# Altium PCB Digital_Clock_PCB_3.0.PcbDoc
Units mm, origin at the board's own origin, x right, y up, seen from the top; angles counter-clockwise.
Board outline 80.51 x 45.51 mm, 2 copper layers (Top Layer, Bottom Layer); 42 components, 38 nets, 161 pads, 318 vias.
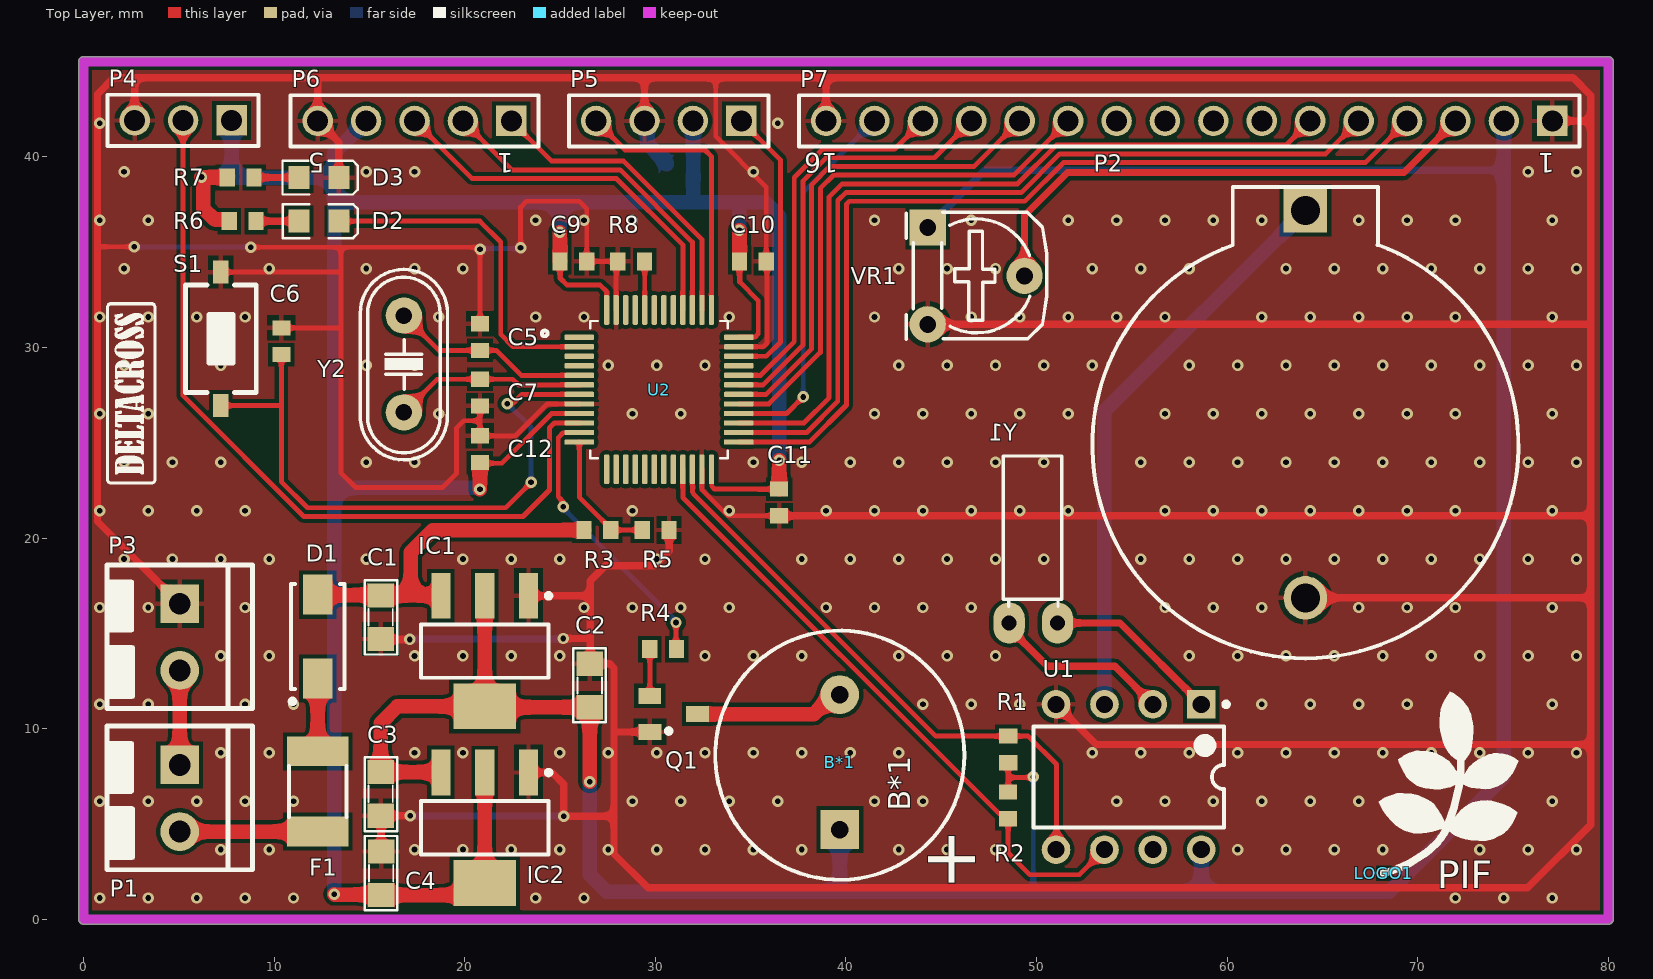
[diagram p0: Top Layer view]
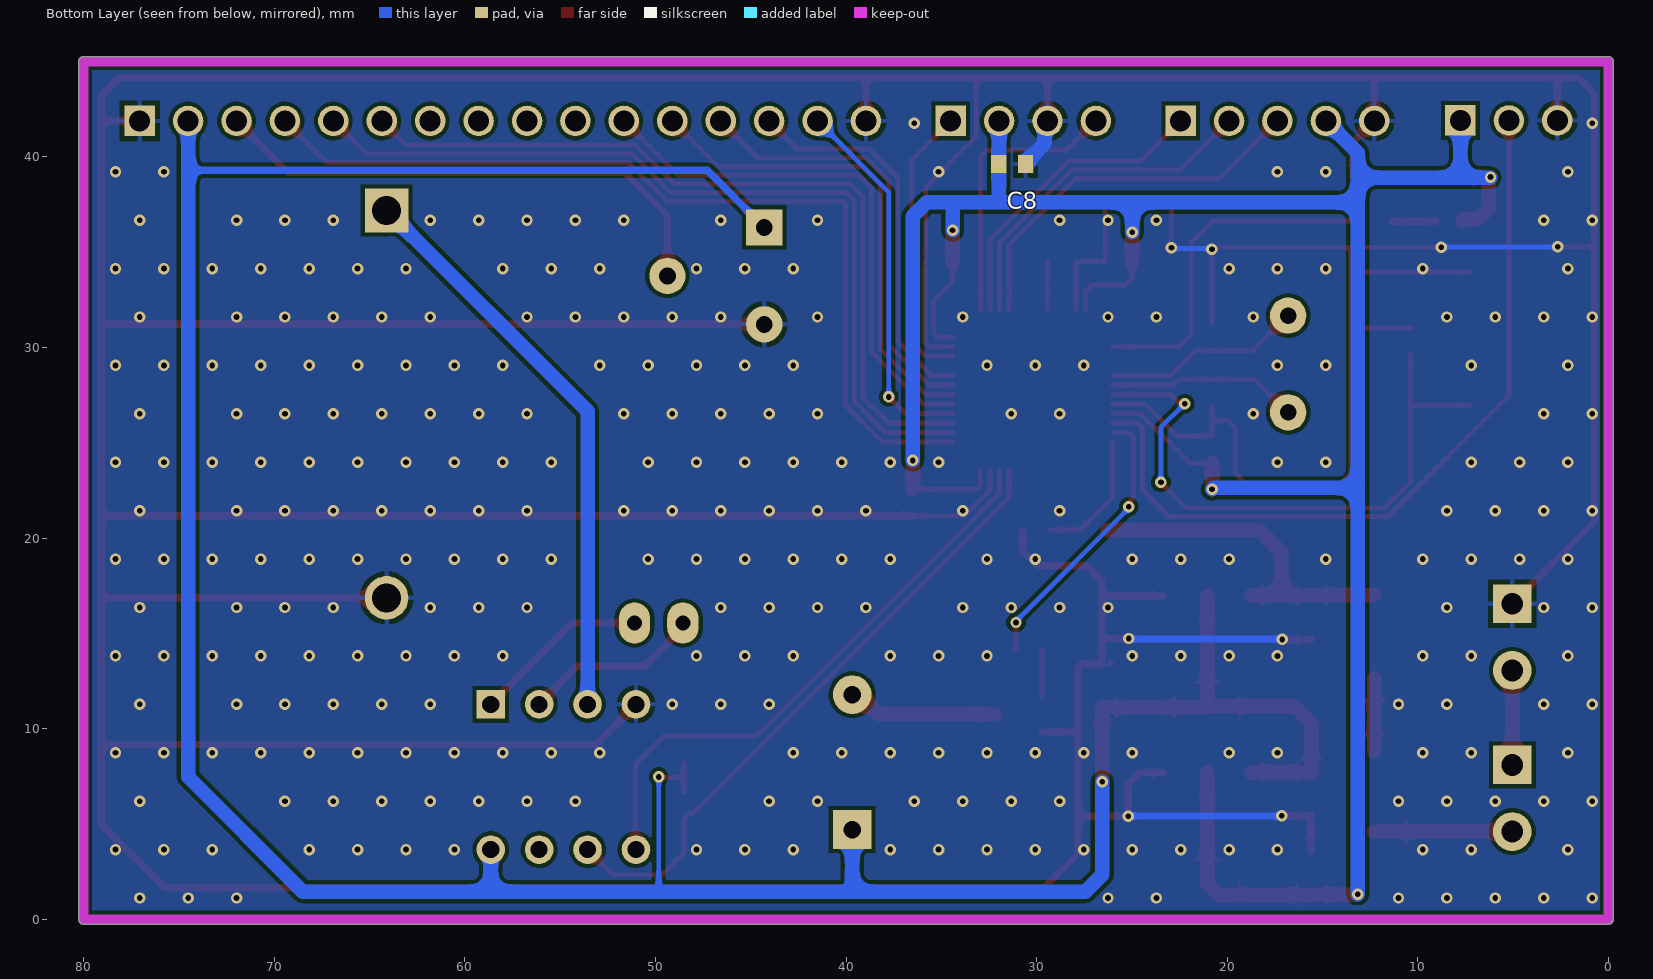
[diagram p1: Bottom Layer view, seen from below]
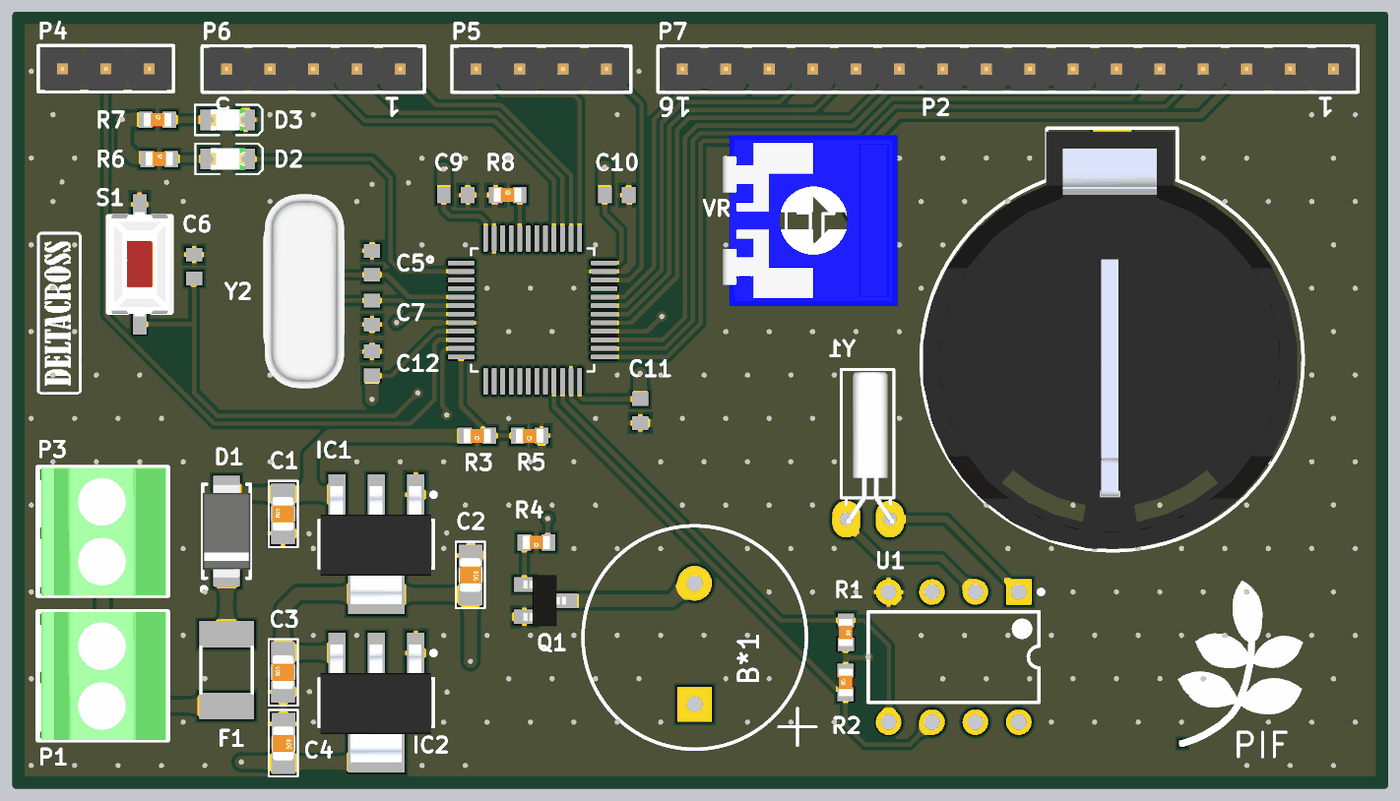
[diagram p2: 3D render of the assembled board from above, using the file's embedded part models]

## Layer stack, top to bottom
Top Solder: solder mask 0.0102, Solder Resist, Dk 3.5
Top Layer: signal copper 0.0356
Dielectric 1: dielectric 0.32, FR-4, Dk 4.8
Bottom Layer: signal copper 0.0356
Bottom Solder: solder mask 0.0102, Solder Resist, Dk 3.5

## Board outline
0,-0.254 cw(c0,0) -0.254,0 -0.254,45 cw(c0,45) 0,45.254 80,45.254 cw(c80,45) 80.254,45 80.254,0 cw(c80,0) 80,-0.254

## Design rules (kind name [scope] priority, off if disabled: settings)
Clearance [All] p1: gap=0.203 ignorepadtopadclearanceinfootprint=TRUE
PolygonConnect [All] p1: thpad.connectstyle=Relief thpad.reliefconductorwidth=0.254 thpad.reliefentries=4 thpad.polygonreliefangle="90 Angle" thpad.airgapwidth=0.254 smdpad.connectstyle=Relief smdpad.reliefconductorwidth=0.254 smdpad.reliefentries=4 smdpad.polygonreliefangle="90 Angle" smdpad.airgapwidth=0.254 via.connectstyle=Direct via.reliefconductorwidth=0.254 via.reliefentries=4 via.polygonreliefangle="90 Angle" via.airgapwidth=0.254
RoutingVias [All] p1: holewidth=0.711 width=1.27 viastyle="Through Hole" minholewidth=0.3 minwidth=0.5 maxholewidth=0.711 maxwidth=1.27
SolderMaskExpansion [All] p1: expansion=0.102 istentingtop=FALSE
Width [All] p1: maxlimit=0.762 minlimit=0.254 preferedwidth=0.381
30 further rules are at their usual default settings.

## Components (designator, comment, footprint, x,y, rotation, side; value= is the part's Value field where it differs from the comment)
B*1 "Buzzer" BUZZER 39.675,6.706 r90 top
C1 "Cap Non-Pol SMD" CAP-SM-0805 15.586,14.707 r90 top value=10uF
C2 "Cap Non-Pol SMD" CAP-SM-0805 26.559,13.411 r270 top value=10uF
C3 "Cap Non-Pol SMD" CAP-SM-0805 15.586,5.436 r90 top value=10uF
C4 "Cap Non-Pol SMD" CAP-SM-0805 15.612,3.556 r270 top value=10uF
C5 "Cap Non-Pol SMD" CAP-SM-0603 20.801,30.547 r270 top value=22pF
C6 "Cap Non-Pol SMD" CAP-SM-0603 10.379,30.328 r270 top value=0.1uF
C7 "Cap Non-Pol SMD" CAP-SM-0603 20.801,27.636 r270 top value=22pF
C8 "Cap Non-Pol SMD" CAP-SM-0603 31.283,39.624 r0 bottom value=0.1uF
C9 "Cap Non-Pol SMD" CAP-SM-0603 25.695,34.519 r180 top value=100nF
C10 "Cap Non-Pol SMD" CAP-SM-0603 35.119,34.519 r180 top value=100nF
C11 "Cap Non-Pol SMD" CAP-SM-0603 36.49,21.869 r90 top value=100nF
C12 "Cap Non-Pol SMD" CAP-SM-0603 20.793,24.663 r270 top value=100nF
D1 "D Schottky" SS34 12.284,14.834 r90 top
D2 "LED SMD" LED_0805_Blue 12.36,36.627 r0 top
D3 "LED SMD" LED_0805_Blue 12.344,38.913 r0 top
F1 "Fuse" "FUSE SMD" 12.284,6.706 r270 top
IC1 "LM1117" SOT223-4N 21.047,14.072 r270 top value=LM317
IC2 "LM1117" SOT223-4N 21.047,4.801 r270 top value=LM317
LOGO1 "LOGO PIF" "PIF LOGO BIG SSTOP" 67.936,2.057 r0 top
P1 "Domino 2" "DOMINO SMALL 2" 6.315,8.103 r270 top
P2 "VBAT" "VBAT CR2030" 64.1,27.026 r90 top
P3 "Domino 2" "DOMINO SMALL 2" 6.315,16.556 r270 top
P4 "61300311121" 61300311121 5.223,41.91 r180 top
P5 "61300411121" 61300411121 30.699,41.885 r180 top
P6 "61300511121" 61300511121 17.364,41.885 r180 top
P7 "61301611121" 61301611121 58.004,41.885 r180 top
Q1 "C1815" SOT23B 30.953,10.77 r270 top
R1 "RESISTOR SMD" RES-SM-0603 48.512,9.597 r270 top value=10K
R2 "RESISTOR SMD" RES-SM-0603 48.505,5.294 r90 top value=10K
R3 "RESISTOR SMD" RES-SM-0603 27.64,20.422 r180 top value=20K
R4 "RESISTOR SMD" RES-SM-0603 31.094,14.173 r180 top value=22K
R5 "RESISTOR SMD" RES-SM-0603 30.699,20.422 r180 top value=10K
R6 "RESISTOR SMD" RES-SM-0603 7.661,36.627 r0 top value=1K
R7 "RESISTOR SMD" RES-SM-0603 7.559,38.919 r0 top value=1K
R8 "RESISTOR SMD" RES-SM-0603 28.043,34.519 r0 top value=100K
S1 "Tact SW - 2Pin" SW-SMD 7.204,30.455 r90 top
U1 "DS1307+" MAXM-P8-1 54.829,7.468 r270 top
U2 "STM32F103C8T6" QFP50P900X900X160-48N 30.191,27.788 r0 top
VR1 "10K" "Varistor 1" 44.288,36.297 r270 top value="VR 10K"
Y1 "32.768kHz" "XTAL 32768 3x8" 48.555,15.545 r90 top
Y2 "XTAL" XT2 16.805,29.134 r90 top

## Footprints (in the part's own frame and the unit in brackets; to place one, negate y for a bottom-side part, rotate by r counter-clockwise, add the part's x,y. Pads: shape width x height; smd on the part's side, far side on the other; paste and mask are expansions set on the pad)
61300311121 [mm] "Pin Header, pitch 2.54 mm, THT, Vertical, single row, 3p"
  rect 1.6x1.6 hole 1.1: 1(-2.54,0)
  round 1.6 hole 1.1: 2(0,0) 3(2.54,0)
  silkscreen extent -3.96,-1.35 3.96,1.35, body extent -3.81,-1.27 3.81,1.27, height 8.57
61300411121 [mm] "Pin Header, pitch 2.54 mm, THT, Vertical, single row, 4p"
  rect 1.6x1.6 hole 1.1: 1(-3.81,0)
  round 1.6 hole 1.1: 2(-1.27,0) 3(1.27,0) 4(3.81,0)
  silkscreen extent -5.23,-1.35 5.23,1.35, body extent -5.08,-1.27 5.08,1.27, height 8.57
61300511121 [mm] "Pin Header, pitch 2.54 mm, THT, Vertical, single row, 5p"
  rect 1.6x1.6 hole 1.1: 1(-5.08,0)
  round 1.6 hole 1.1: 2(-2.54,0) 3(0,0) 4(2.54,0) 5(5.08,0)
  silkscreen extent -6.5,-1.35 6.5,1.35, body extent -6.35,-1.27 6.35,1.27, height 8.57
61301611121 [mm] "Pin Header, pitch 2.54 mm, THT, Vertical, single row, 16p"
  rect 1.6x1.6 hole 1.1: 1(-19.05,0)
  round 1.6 hole 1.1: 2(-16.51,0) 3(-13.97,0) 4(-11.43,0) 5(-8.89,0) 6(-6.35,0) 7(-3.81,0) 8(-1.27,0) 9(1.27,0) 10(3.81,0) 11(6.35,0) 12(8.89,0) 13(11.43,0) 14(13.97,0) 15(16.51,0) 16(19.05,0)
  silkscreen extent -20.47,-1.35 20.47,1.35, body extent -20.32,-1.27 20.32,1.27, height 8.57
BUZZER [mil]
  rect 80x80 hole 36: 1(-78.73,0)
  round 80 hole 36: 2(200,0)
  silkscreen extent -182,-257 332,257
CAP-SM-0603 [mm] "SMD Ceramic Capacitor Size 0603"
  rect 0.8x0.95 smd: 1(-0.7,0) 2(0.7,0)
  body extent -0.85,-0.45 0.85,0.45, height 0.6
CAP-SM-0805 [mil]
  rect 50x55 smd: 1(0,0) 2(90,0)
  silkscreen extent -32,-34 121,33, body extent 6,-25 84,25, height 31
"DOMINO SMALL 2" [mil] "3.5 mm"
  rect 80x80 hole 45: 1(0,-50)
  round 80 hole 45: 2(137.8,-50)
  silkscreen extent -80,-203 217,100, body extent -79,-192 217,95, height 335
"FUSE SMD" [mm] "SMD FUSE"
  rect 1.55x3.21 smd: 1(-2.1,0) 2(2.1,0)
  silkscreen extent -1.35,-1.5 1.35,1.51, body extent -2.37,-1.71 2.36,1.71, height 0.75
LED_0805_Blue [mm] "Chip LED, 2-Leads, Body 2.0x1.3mm, IPC Medium Density"
  rect 1.1x1.2 smd: 1(-1.05,0) 2(1.05,0)
  silkscreen extent -1.91,-0.89 2.03,0.89, body extent -1,-0.63 1,0.62, height 0.68
MAXM-P8-1 [mm] "DIP, 8-Leads, Body 9.375x6.985mm, Pitch 2.54mm"
  rect 1.5x1.5 hole 0.9: 1(-3.81,3.81)
  round 1.5 hole 0.9: 2(-3.81,1.27) 3(-3.81,-1.27) 4(-3.81,-3.81) 5(3.81,-3.81) 6(3.81,-1.27) 7(3.81,1.27) 8(3.81,3.81)
  silkscreen extent -3.93,-5 2.65,5.24, body extent -3.95,-4.95 3.95,4.95, height 4.58
"PIF LOGO BIG SSTOP" [mil]
  rect 15x15 smd: 1(11,14)
  silkscreen extent 0,14 289,389
QFP50P900X900X160-48N [mm]
  rrect50% 1.56x0.28 smd: 1(-4.18,2.75) 2(-4.18,2.25) 3(-4.18,1.75) 4(-4.18,1.25) 5(-4.18,0.75) 6(-4.18,0.25) 7(-4.18,-0.25) 8(-4.18,-0.75) 9(-4.18,-1.25) 10(-4.18,-1.75) 11(-4.18,-2.25) 12(-4.18,-2.75) 25(4.18,-2.75) 26(4.18,-2.25) 27(4.18,-1.75) 28(4.18,-1.25) 29(4.18,-0.75) 30(4.18,-0.25) 31(4.18,0.25) 32(4.18,0.75) 33(4.18,1.25) 34(4.18,1.75) 35(4.18,2.25) 36(4.18,2.75)
  rrect50% 0.28x1.56 smd: 13(-2.75,-4.18) 14(-2.25,-4.18) 15(-1.75,-4.18) 16(-1.25,-4.18) 17(-0.75,-4.18) 18(-0.25,-4.18) 19(0.25,-4.18) 20(0.75,-4.18) 21(1.25,-4.18) 22(1.75,-4.18) 23(2.25,-4.18) 24(2.75,-4.18) 37(2.75,4.18) 38(2.25,4.18) 39(1.75,4.18) 40(1.25,4.18) 41(0.75,4.18) 42(0.25,4.18) 43(-0.25,4.18) 44(-0.75,4.18) 45(-1.25,4.18) 46(-1.75,4.18) 47(-2.25,4.18) 48(-2.75,4.18)
  silkscreen extent -6.15,-3.6 3.6,3.6
RES-SM-0603 [mm]
  rect 0.8x0.95 smd: 1(-0.014,0) 2(1.386,0)
  body extent -0.11,-0.4 1.49,0.4, height 0.3
SOT23B [mm] "SOT 23B"
  rect 0.85x1.2 smd: 1(0.94,-1.245) 2(0,1.25) 3(-0.95,-1.25)
  silkscreen extent 0.77,-0.38 1.02,-0.13, body extent -1.5,-1.3 1.5,1.2, height 1.06
SOT223-4N [mm] "SOT223, 4-Leads, Body 6.5x3.5mm, Pitch 2.3mm, Lead Span 7mm, IPC Medium Density"
  rect 2.4x1 smd: 1(-2.9,2.3) 2(-2.9,0) 3(-2.9,-2.3)
  rect 2.4x3.3 smd: 4(2.9,0)
  silkscreen extent -3.02,-3.35 1.4,3.48, body extent -3.39,-3.27 3.5,3.23, height 1.72
SS34 [mm] "DO-214-AC/SMA Molded Diode, Body 5.3x2.6mm, IPC Medium Density"
  rect 2.1x1.55 smd: 1(-2.2,0) 2(2.2,0)
  silkscreen extent -3.52,-1.4 2.75,1.45, body extent -2.75,-1.4 2.75,1.4, height 2.3
SW-SMD [mm] "Switch SMD type"
  rect 1.2x0.8 smd: 1(-3.5,0) 2(3.5,0)
  silkscreen extent -2.82,-1.85 2.82,1.85, body extent -3.05,-1.85 3.05,1.85, height 2.5
"Varistor 1" [mil] "Resistor Variable"
  rect 75x75 hole 35: 1(0,0)
  round 75 hole 35: 2(100,200) 3(200,0)
  silkscreen extent -31,-44 231,246, body extent -68,-117 326,285, height 165
"VBAT CR2030" [mil]
  rect 90x90 hole 60: 1(400,0)
  round 90 hole 60: 2(-400,0)
  silkscreen extent -525,-440 449,440, body extent -523,-428 442,438, height 335
XT2 [mil] "Footpin for Crystal 2 pin"
  round 75 hole 34: 1(-100,0) 2(100,0)
  silkscreen extent -198,-90 195,90, body extent -233,-93 213,90, height 138
"XTAL 32768 3x8" [mil] "Crystal for 32,768kHz, 2pin"
  oval 85x65 hole 31: 1(0,0) 2(0,-100)
  silkscreen extent 34,-109 345,12, body extent -11,-111 339,1, height 98

## Part data
C1 C2 C3 C4 C5 C6 C7 C8 C9 C10 C11 C12: "Capacitor"
D1: "Schottky Diode", Code_JEDEC=DO-214-AA, LatestRevisionDate=17-Jul-2002, LatestRevisionNote="Re-released for DXP Platform.", PackageDescription="DO-214-AA/SMB; 2 C-Bend Leads; Body 5.3 x 3.6 mm, inc. leads (LxW)", PackageReference=SMB, Published=8-Jun-2000, Publisher="Altium Limited"
D2 D3: "LED"
IC1 IC2: "Available in 1.8V, 2.5V, 2.85V, 3.3V, 5V, and  Adjustable Versions"
P1 P3: "Domino, 2-Pin", LatestRevisionDate=17-Jul-2002, LatestRevisionNote="Re-released for DXP Platform.", Publisher="Altium Limited"
P2: library part "VBAT CR2032", "CR2032", Manufacturer="DANTONA INDUSTRIES", Manufacturer Part Number="CR2032 SANYO", ComponentLink1Description=http://www.farnell.com/datasheets/1797668.pdf, ComponentLink1URL=http://www.farnell.com/datasheets/1797668.pdf, ComponentLink2Description=/datasheets/DANTONA/CRSANYO.pdf, ComponentLink2URL=/datasheets/DANTONA/CRSANYO.pdf, Pricing 1="1=0.768, 5=0.655, 10=0.615, 25=0.565, 50=0.51, 100=0.46, 250=0.41 (USD)", RoHS=NA, Stock 1=1694, Supplier 1=Newark
P4: "WR-PHD Pin Header, THT, pitch 2.54mm, Single Row, Vertical, 3p", Contact Resistance=20mOhm, Manufacturer="Wurth Elektronik", Operating Temperature="-40 to +105degC", Rated Current=3A, Withstanding Voltage=500VAC, Working Voltage=250VAC, ComponentLink1Description=Manufacturer, ComponentLink1URL=http://www.we-online.de, ComponentLink2Description=Datasheet, ComponentLink2URL=https://www.we-online.com/catalog/datasheet/61300311121.pdf, Gender="Pin Header", Manufacturer Part Number=61300311121, Mounting Technology=THT, Orientation=Vertical, Packaging=Bag, Pin Number=3, Pitch=2.54mm, Published Date="May 2020", Row Number=Single
P5: "WR-PHD Pin Header, THT, pitch 2.54mm, Single Row, Vertical, 4p", Contact Resistance=20mOhm, Manufacturer="Wurth Elektronik", Operating Temperature="-40 to +105degC", Rated Current=3A, Withstanding Voltage=500VAC, Working Voltage=250VAC, ComponentLink1Description=Manufacturer, ComponentLink1URL=http://www.we-online.de, ComponentLink2Description=Datasheet, ComponentLink2URL=https://www.we-online.com/catalog/datasheet/61300411121.pdf, Gender="Pin Header", Manufacturer Part Number=61300411121, Mounting Technology=THT, Orientation=Vertical, Packaging=Bag, Pin Number=4, Pitch=2.54mm, Published Date="May 2020", Row Number=Single
P6: "WR-PHD Pin Header, THT, pitch 2.54mm, Single Row, Vertical, 5p", Contact Resistance=20mOhm, Manufacturer="Wurth Elektronik", Operating Temperature="-40 to +105degC", Rated Current=3A, Withstanding Voltage=500VAC, Working Voltage=250VAC, ComponentLink1Description=Manufacturer, ComponentLink1URL=http://www.we-online.de, ComponentLink2Description=Datasheet, ComponentLink2URL=https://www.we-online.com/catalog/datasheet/61300511121.pdf, Gender="Pin Header", Manufacturer Part Number=61300511121, Mounting Technology=THT, Orientation=Vertical, Packaging=Bag, Pin Number=5, Pitch=2.54mm, Published Date="May 2020", Row Number=Single
P7: "WR-PHD Pin Header, THT, pitch 2.54mm, Single Row, Vertical, 16p", Contact Resistance=20mOhm, Manufacturer="Wurth Elektronik", Operating Temperature="-40 to +105degC", Rated Current=3A, Withstanding Voltage=500VAC, Working Voltage=250VAC, ComponentLink1Description=Manufacturer, ComponentLink1URL=http://www.we-online.de, ComponentLink2Description=Datasheet, ComponentLink2URL=https://www.we-online.com/catalog/datasheet/61301611121.pdf, Gender="Pin Header", Manufacturer Part Number=61301611121, Mounting Technology=THT, Orientation=Vertical, Packaging=Bag, Pin Number=16, Pitch=2.54mm, Published Date="May 2020", Row Number=Single
Q1: "NPN Bipolar Transistor"
R1 R2 R3 R4 R5 R6 R7 R8: "Resistor"
S1: "Switch button 2 pin"
U1: library part CMP-016-00004-3, "I2C Real-Time Clock, 5 V, 0 to 70 degC, 8-Pin DIP, RoHS, Tube", Case/Package=DIP, Manufacturer=Maxim, Max Operating Temperature=70°C, Max Supply Voltage=5.5V, Min Operating Temperature=0°C, Min Supply Voltage=4.5V, Nominal Supply Voltage=5V, Package Description="8-Pin Plastic Dual-In-Line, Narrow (0.3in) (P8-1), Body 9.375 x 6.985 mm, Pitch 2.54 mm", Package Quantity=50, Package Reference=P8-1, Package Version="Rev. E, 04/2011", Datasheet URL=https://datasheet.ciiva.com/20167/82-0567-20167410.pdf, Datasheet Version="Rev. 100208, 10/2008", Interface=Serial, Manufacturer URL=http://www.maximintegrated.com/, Mounting Technology=TH, Package URL=http://pdfserv.maximintegrated.com/package_dwgs/21-0043.PDF, Packaging=Rail/Tube, Pins=8, RoHS Compliant=True
U2: "Mainstream Performance line, ARM Cortex-M3 MCU with 64 Kbytes Flash, 72 MHz CPU, motor control, USB and CAN", Package=None, Availability=Unavailable, MP=STM32F103C8T6, Price=None
VR1: library part "Var Resistor", "Var Resistor"
Y1: library part XTAL, "Crystal For all Crystal 2pin"
Y2: "Crystal Oscillator", LatestRevisionDate=17-Jul-2002, LatestRevisionNote="Re-released for DXP Platform.", PackageDescription="Crystal, Thru-Hole; 2 Leads; Body 3.1 x 8.2 mm (Dia.xH)", PackageReference=R38, Published=8-Jun-2000, Publisher="Altium Limited"

## Via types
v1: diameter 0.6, hole 0.3, Top Layer to Bottom Layer, tented both sides, 318 vias

## Nets (pads, with @x,y where several pads share a name; then routed paths per layer and width w, separated by ;. In a path a pad name is that pad's centre, name@x,y a point inside that pad or via, vN(x,y) a via of type N, cw(c..) or ccw(c..) an arc to the next point about the centre after c; other vN are vias at no path point)
3V3: C4.2 C8.2 C9.2 C10.2 C11.2 C12.2 IC2.2 IC2.4 P4.1 P5.2 P6.4 R6.1 R7.1 U2.9 U2.24 U2.36 U2.48 | length 148.2
  Top Layer w0.254: C12.2 20.83,23.927 21.946,23.927 24.557,26.538 U2.9 ; C9.2 24.995,33.644 25.365,33.274 27.104,33.274 27.441,32.937 U2.48 ; U2.24 32.954,23.595 32.954,22.718 33.103,22.569 C11.2 ; U2.36 34.384,30.551 35.24,30.551 35.398,30.709 35.398,32.461 34.419,33.441 C10.2
  Top Layer w0.762: v1(6.188,38.938) 6.198,38.929 v1@6.204,38.929 ; R7.1 7.535,38.929 v1@6.204,38.929 ; R7.1@7.578,38.964 R7.1@7.578,38.976 ; R6.1 7.647,36.702 7.628,36.721 6.856,36.721 6.285,37.292 6.285,38.816 6.188,38.913 v1@6.204,38.929 ; v1(13.148,1.321) 13.173,1.295 15.586,1.295 C4.2 20.417,1.27 IC2.4 IC2.2 ; v1(20.793,22.555) C12.2 ; v1(24.984,36.043) 24.99,36.037 24.99,34.524 C9.2 ; v1(34.408,36.144) 34.413,36.139 34.413,34.524 C10.2 ; C11.2 36.493,22.572 36.493,24.07 v1(36.495,24.072)
  Bottom Layer w0.762: v1@6.214,38.913 7.763,38.913 ; P4.1 7.763,38.913 ; v1(13.148,1.321) 13.148,22.631 ; P6.4 13.148,40.208 13.148,38.913 ; v1(20.793,22.555) 20.717,22.631 13.148,22.631 ; v1(24.984,36.043) 24.984,37.617 ; P5.2 31.976,41.878 31.976,39.631 C8.2 31.983,37.632 31.969,37.617 ; v1(34.408,36.144) 34.408,37.592 34.433,37.617 ; v1(36.495,24.072) 36.495,36.877 35.754,37.617 34.433,37.617 ; 7.763,38.913 13.148,38.913 ; 13.148,22.631 13.148,37.617 ; 13.148,37.617 13.148,38.913 ; 13.148,37.617 24.984,37.617 ; 24.984,37.617 31.969,37.617 ; 31.969,37.617 34.433,37.617
5V: B*1.1 C2.2 C3.2 IC1.2 IC1.4 IC2.3 P7.2 R1.2 R2.2 U1.8 VR1.1 | length 162.8
  Top Layer w0.254: R2.2 48.505,7.442 ; R1.2 48.505,8.203 48.505,7.442 ; v1(49.825,7.468) 49.8,7.442 48.505,7.442
  Top Layer w0.762: IC2.3 18.726,7.722 C3.2 15.586,10.287 16.471,11.172 IC1.4 ; IC1.2 IC1.4 ; v1(26.559,7.214) C2.2 21.094,11.125 IC1.4
  Bottom Layer w0.254: 49.825,1.448 v1(49.825,7.468)
  Bottom Layer w0.381: VR1.1 47.285,39.294 74.514,39.294
  Bottom Layer w0.762: v1(26.559,7.214) 26.559,2.337 27.448,1.448 39.675,1.448 ; B*1.1 39.675,1.448 ; 40.097,1.473 40.123,1.448 ; U1.8 58.639,1.448 ; P7.2 74.514,39.294 74.514,7.468 68.494,1.448 58.639,1.448 ; 39.675,1.448 40.123,1.448 ; 40.123,1.448 49.825,1.448 58.639,1.448
ADC_PIN: R3.1 R5.2 U2.12 | length 7
  Top Layer w0.254: U2.12 26.011,22.14 27.654,20.497 R3.1 R5.2
BL: P7.15 U2.28 | length 19.8
  Top Layer w0.254: U2.28 36.891,26.538 v1(37.76,27.407)
  Bottom Layer w0.254: v1(37.76,27.407) 37.76,38.151 P7.15
BOOT0: R8.2 U2.44 | length 2.6
  Top Layer w0.254: R8.2 29.441,34.507 U2.44
BUZZER: R4.1 U2.11 | length 14.9
  Top Layer w0.254: v1(25.162,21.641) 25.162,21.916 24.901,22.177 24.901,25.273 25.152,25.525 25.998,25.525 U2.11 ; v1(31.08,15.57) 31.08,14.202 R4.1
  Bottom Layer w0.254: v1(25.162,21.641) 25.162,21.565 31.08,15.646 v1(31.08,15.57)
D4: P7.11 U2.29 | length 28.5
  Top Layer w0.254: U2.29 35.953,27.038 38.654,29.739 38.654,38.351 39.343,39.04 48.809,39.04 P7.11
D5: P7.12 U2.30 | length 25.7
  Top Layer w0.254: U2.30 35.806,27.538 38.197,29.928 38.197,38.54 39.154,39.497 46.727,39.497 P7.12
D6: P7.13 U2.31 | length 23
  Top Layer w0.254: U2.31 35.66,28.038 37.74,30.117 37.74,38.729 38.964,39.954 44.644,39.954 P7.13
D7: P7.14 U2.32 | length 20.2
  Top Layer w0.254: U2.32 35.513,28.538 37.282,30.307 37.282,38.919 38.775,40.411 42.561,40.411 P7.14@44.018,41.868
DHT_PIN: P4.2 U2.10 | length 41.8
  Top Layer w0.254: P4.2 5.223,27.469 11.559,21.133 23.054,21.133 24.444,22.523 24.444,25.778 24.704,26.038 U2.10
EN: P7.6 U2.27 | length 42.7
  Top Layer w0.254: U2.27 37.788,26.038 39.111,27.36 39.111,37.898 39.796,38.583 48.999,38.583 51.031,40.615 63.084,40.615 P7.6
GND: C1.1 C2.1 C3.1 C4.1 C5.1 C6.1 C7.2 C8.1 C9.1 C10.1 C11.1 C12.1 D3.2 IC1.1 IC2.1 P2.2 P3.1 P4.3 P5.3 P6.5 P7.1 P7.16 Q1.1 R5.1 R8.1 S1.2 U1.4 U2.8 U2.23 U2.35 U2.47 VR1.3 | length 493.6
  Top Layer w0.254: 0.727,35.281 v1(2.658,35.281) ; S1.2 13.473,33.955 13.503,33.985 ; v1@8.785,35.261 13.503,35.261 ; C6.1 13.441,31.028 13.503,31.09 ; C7.2 20.801,26.153 ; C5.1 v1(20.801,35.146) 20.686,35.261 13.503,35.261 ; v1(22.927,35.23) 22.927,37.363 23.232,37.668 26,37.668 26.395,37.273 C9.1 27.853,34.519 27.941,34.431 U2.47 ; U2.8 24.336,27.038 22.662,25.363 C12.1 20.801,25.371 20.801,26.153 ; U2.23 32.441,22.524 33.796,21.169 C11.1 ; 33.163,44.145 33.163,41.072 35.819,38.416 C10.1 35.855,34.482 35.855,30.223 35.67,30.038 U2.35 ; 13.503,31.09 13.503,33.985 ; 13.503,31.09 13.503,23.419 14.265,22.657 18.837,22.657 19.574,23.393 19.574,25.781 19.946,26.153 20.801,26.153 ; 13.503,33.985 13.503,35.261
  Top Layer w0.381: P4.3 2.683,44.145 ; P3.1 0.727,20.874 0.727,35.281 0.727,43.282 1.591,44.145 2.683,44.145 ; D3.2 13.394,40.775 P6.5 12.284,44.094 12.335,44.145 ; C1.1 15.612,14.681 v1(17.11,14.681) ; C4.1 15.612,5.41 C3.1 v1(17.136,5.436) ; IC2.1 24.573,7.701 25.187,7.087 v1(25.187,5.41) 27.829,5.41 ; IC1.1 26.584,16.972 ; v1(25.162,14.732) 26.534,14.732 26.584,14.783 ; C2.1@26.127,13.411 C2.1@26.153,13.437 ; P5.3 29.429,44.145 ; Q1.1 27.854,9.83 27.829,9.855 ; R5.1 30.725,20.41 30.725,19.329 29.937,18.542 27.372,18.542 26.584,17.755 26.584,16.972 ; C11.1 79.068,21.169 ; P7.16 38.954,44.145 ; VR1.3 79.045,31.217 ; U1.4 53.127,9.169 79.068,9.169 ; P2.2 79.068,16.866 ; P7.1 79.068,41.885 ; 2.683,44.145 12.335,44.145 ; 12.335,44.145 29.429,44.145 ; 26.584,14.783 26.584,16.972 ; 26.584,14.783 26.584,13.437 C2.1 27.606,13.411 27.829,13.188 27.829,9.855 ; 27.829,5.41 27.829,9.855 ; 27.829,5.41 27.829,3.429 29.607,1.651 75.759,1.651 79.068,4.961 79.068,9.169 ; 29.429,44.145 33.163,44.145 38.954,44.145 ; 38.954,44.145 78.146,44.145 79.068,43.223 79.068,41.885 ; 79.068,9.169 79.068,16.866 ; 79.068,16.866 79.068,21.169 ; 79.068,21.169 79.068,31.217 79.068,41.885
  Bottom Layer w0.254: v1(2.658,35.281) 2.67,35.268 8.766,35.268 v1(8.779,35.255) ; v1(20.801,35.146) 20.843,35.188 22.885,35.188 v1(22.927,35.23)
  Bottom Layer w0.381: v1(17.11,14.681) 17.136,14.707 25.137,14.707 v1(25.162,14.732) ; v1(17.136,5.436) 17.148,5.423 25.175,5.423 v1(25.187,5.41)
  Bottom Layer w0.762: P5.3 29.59,41.724 29.59,40.693 30.583,39.699 C8.1
  other v1: 0.854,1.118 3.394,1.118 5.934,1.118 8.474,1.118 11.014,1.118 23.714,1.118 26.254,1.118 71.974,1.118 74.514,1.118 77.054,1.118 2.124,3.658 7.204,3.658 9.744,3.658 17.364,3.658 19.904,3.658 22.444,3.658 24.984,3.658 27.524,3.658 30.064,3.658 32.604,3.658 35.144,3.658 37.684,3.658 42.764,3.658 45.304,3.658 47.844,3.658 60.544,3.658 63.084,3.658 65.624,3.658 68.164,3.658 73.244,3.658 75.784,3.658 78.324,3.658 0.854,6.198 3.394,6.198 5.934,6.198 8.474,6.198 11.014,6.198 28.794,6.198 31.334,6.198 33.874,6.198 36.414,6.198 41.494,6.198 44.034,6.198 54.194,6.198 56.734,6.198 59.274,6.198 61.814,6.198 64.354,6.198 66.894,6.198 69.434,6.198 77.054,6.198 2.124,8.738 7.204,8.738 9.744,8.738 17.364,8.738 19.904,8.738 24.984,8.738 27.524,8.738 30.064,8.738 32.604,8.738 35.144,8.738 37.684,8.738 40.224,8.738 42.764,8.738 52.924,8.738 55.464,8.738 58.004,8.738 60.544,8.738 63.084,8.738 65.624,8.738 68.164,8.738 70.704,8.738 73.244,8.738 75.784,8.738 78.324,8.738 0.854,11.278 3.394,11.278 8.474,11.278 11.014,11.278 44.034,11.278 46.574,11.278 49.114,11.278 61.814,11.278 64.354,11.278 66.894,11.278 69.434,11.278 71.974,11.278 77.054,11.278 2.124,13.818 7.204,13.818 9.744,13.818 17.364,13.818 19.904,13.818 22.444,13.818 24.984,13.818 32.604,13.818 35.144,13.818 37.684,13.818 42.764,13.818 45.304,13.818 47.844,13.818 58.004,13.818 60.544,13.818 63.084,13.818 65.624,13.818 68.164,13.818 70.704,13.818 73.244,13.818 75.784,13.818 78.324,13.818 0.854,16.358 3.394,16.358 8.474,16.358 26.254,16.358 28.794,16.358 31.334,16.358 33.874,16.358 38.954,16.358 41.494,16.358 44.034,16.358 46.574,16.358 56.734,16.358 59.274,16.358 61.814,16.358 66.894,16.358 69.434,16.358 71.974,16.358 77.054,16.358 2.124,18.898 4.664,18.898 7.204,18.898 9.744,18.898 14.824,18.898 19.904,18.898 22.444,18.898 24.984,18.898 30.064,18.898 32.604,18.898 37.684,18.898 40.224,18.898 42.764,18.898 45.304,18.898 47.844,18.898 50.384,18.898 55.464,18.898 58.004,18.898 60.544,18.898 63.084,18.898 65.624,18.898 68.164,18.898 70.704,18.898 73.244,18.898 75.784,18.898 78.324,18.898 0.854,21.438 3.394,21.438 5.934,21.438 8.474,21.438 28.794,21.438 33.874,21.438 38.954,21.438 41.494,21.438 44.034,21.438 46.574,21.438 49.114,21.438 51.654,21.438 56.734,21.438 59.274,21.438 61.814,21.438 64.354,21.438 66.894,21.438 69.434,21.438 71.974,21.438 77.054,21.438 2.124,23.978 4.664,23.978 7.204,23.978 14.824,23.978 17.364,23.978 35.144,23.978 37.684,23.978 40.224,23.978 42.764,23.978 45.304,23.978 47.844,23.978 50.384,23.978 55.464,23.978 58.004,23.978 60.544,23.978 63.084,23.978 65.624,23.978 68.164,23.978 70.704,23.978 73.244,23.978 75.784,23.978 78.324,23.978 0.854,26.518 3.394,26.518 18.634,26.518 28.794,26.518 31.334,26.518 41.494,26.518 44.034,26.518 46.574,26.518 49.114,26.518 51.654,26.518 56.734,26.518 59.274,26.518 61.814,26.518 64.354,26.518 66.894,26.518 69.434,26.518 71.974,26.518 77.054,26.518 2.124,29.058 7.204,29.058 14.824,29.058 17.364,29.058 27.524,29.058 30.064,29.058 32.604,29.058 42.764,29.058 45.304,29.058 47.844,29.058 50.384,29.058 52.924,29.058 58.004,29.058 60.544,29.058 63.084,29.058 65.624,29.058 68.164,29.058 70.704,29.058 73.244,29.058 75.784,29.058 78.324,29.058 0.854,31.598 3.394,31.598 5.934,31.598 8.474,31.598 18.634,31.598 23.714,31.598 26.254,31.598 33.874,31.598 41.494,31.598 46.574,31.598 49.114,31.598 51.654,31.598 54.194,31.598 56.734,31.598 61.814,31.598 64.354,31.598 66.894,31.598 69.434,31.598 71.974,31.598 77.054,31.598 2.124,34.138 9.744,34.138 14.824,34.138 17.364,34.138 19.904,34.138 42.764,34.138 45.304,34.138 47.844,34.138 52.924,34.138 55.464,34.138 58.004,34.138 63.084,34.138 65.624,34.138 68.164,34.138 70.704,34.138 73.244,34.138 75.784,34.138 78.324,34.138 0.854,36.678 3.394,36.678 23.714,36.678 26.254,36.678 28.794,36.678 41.494,36.678 46.574,36.678 51.654,36.678 54.194,36.678 56.734,36.678 59.274,36.678 61.814,36.678 66.894,36.678 69.434,36.678 71.974,36.678 77.054,36.678 2.124,39.218 14.824,39.218 17.364,39.218 35.144,39.218 75.784,39.218 78.324,39.218 0.854,41.758 36.414,41.758
I2C_SCL: R2.1 U1.6 U2.21 | length 33.4
  Top Layer w0.254: U2.21 31.441,22.127 48.015,5.553 48.232,5.553 R2.1 48.505,3.48 49.644,2.34 52.242,2.34 U1.6
I2C_SDA: R1.1 U1.5 U2.22 | length 30.7
  Top Layer w0.254: U2.22 31.954,23.595 31.954,22.402 31.984,22.372 31.984,22.335 44.708,9.611 R1.1 49.562,9.611 51.045,8.128 51.045,3.683 U1.5
NetB*1_2: B*1.2 Q1.2 | length 7.9
  Top Layer w0.762: Q1.2 38.315,10.77 39.331,11.786 B*1.2
NetD1_1: D1.1 F1.1 | length 3.8
  Top Layer w0.762: F1.1 D1.1
NetD2_1: D2.1 R6.2 | length 2.3
  Top Layer w0.381: R6.2 D2.1
NetD3_1: D3.1 R7.2 | length 2.4
  Top Layer w0.381: R7.2 11.287,38.919 D3.1
NetF1_2: F1.2 P1.2 | length 7.2
  Top Layer w0.762: P1.2 5.047,4.604 12.283,4.604 F1.2
NetP1_1: P1.1 P3.2 | length 5
  Top Layer w0.762: P1.1 P3.2
NetP2_1: P2.1 U1.3 | length 30.3
  Bottom Layer w0.762: U1.3 53.559,26.645 P2.1
NetP7_3: P7.3 VR1.2 | length 27.8
  Top Layer w0.381: VR1.2 49.368,36.922 51.625,39.179 69.269,39.179 P7.3
NetQ1_3: Q1.3 R4.2 | length 2.5
  Top Layer w0.254: Q1.3 29.709,11.725 R4.2
NetU1_1: U1.1 Y1.2 | length 9.3
  Top Layer w0.381: Y1.2 54.372,15.545 U1.1
NetU1_2: U1.2 Y1.1 | length 9.5
  Top Layer w0.381: Y1.1 48.555,15.291 50.576,13.27 54.107,13.27 U1.2
NRST: C6.2 S1.1 U2.7 | length 32.7
  Top Layer w0.254: S1.1 10.374,26.955 10.379,26.949 ; C6.2 10.379,26.949 ; v1(22.234,27.051) 22.509,27.051 22.995,27.538 U2.7 ; v1(23.479,22.923) 22.146,21.59 11.748,21.59 10.379,22.959 10.379,26.949
  Bottom Layer w0.254: v1(22.234,27.051) 23.479,25.806 v1(23.479,22.923)
RCC_OSC_IN: C5.2 U2.5 Y2.2 | length 10.5
  Top Layer w0.254: Y2.2 18.632,29.847 21.655,29.847 22.964,28.538 U2.5
RCC_OSC_OUT: C7.1 U2.6 Y2.1 | length 10.1
  Top Layer w0.254: Y2.1 18.547,28.336 C7.1 22.519,28.336 22.818,28.038 U2.6
RE_CLK: P6.1 U2.38 | length 16.3
  Top Layer w0.254: P6.1 24.552,39.776 28.337,39.776 32.441,35.672 U2.38
RE_DT: P6.2 U2.39 | length 18.2
  Top Layer w0.254: P6.2 22.47,39.319 28.148,39.319 31.941,35.526 U2.39
RE_SW: P6.3 U2.40 | length 20.2
  Top Layer w0.254: P6.3 20.387,38.862 27.958,38.862 31.441,35.379 U2.40
RS: P7.4 U2.25 | length 48.2
  Top Layer w0.254: U2.25 38.082,25.038 40.026,26.982 40.026,37.519 40.174,37.668 49.378,37.668 51.41,39.7 67.25,39.7 P7.4
RW: P7.5 U2.26 | length 45.5
  Top Layer w0.254: U2.26 37.935,25.538 39.568,27.171 39.568,37.709 39.985,38.125 49.188,38.125 51.22,40.157 65.167,40.157 P7.5
SWCLK: P5.4 U2.37 | length 14.9
  Top Layer w0.254: P5.4 28.413,40.361 32.604,40.361 32.941,40.024 U2.37
SWDIO: P5.1 U2.34 | length 15
  Top Layer w0.254: U2.34 35.817,29.538 36.567,30.288 36.567,39.827 P5.1
  Bottom Layer w0.762: P5.1@34.504,41.879 P5.1
TESTING_LED: D2.2 U2.2 | length 18.2
  Top Layer w0.254: D2.2 20.793,36.627 21.885,35.535 21.885,30.683 22.531,30.038 U2.2
Vin: C1.2 D1.2 IC1.3 R3.2 | length 18.3
  Top Layer w0.762: D1.2 12.305,17.013 15.566,17.013 C1.2 17.156,16.993 ; IC1.3 18.726,16.993 17.156,16.993 ; R3.2 18.329,20.422 17.156,19.248 17.156,16.993
pads on no net: LOGO1.1 P7.7 P7.8 P7.9 P7.10 U1.7 U2.1 U2.3 U2.4 U2.13 U2.14 U2.15 U2.16 U2.17 U2.18 U2.19 U2.20 U2.33 U2.41 U2.42 U2.43 U2.45 U2.46

## Polygon pours and split planes (outlines as drawn)
GND on Bottom Layer "GND_L02_P006" (solid, remove dead copper, pour order 6): 0,-0.254 cw(c0,0) -0.254,0 -0.254,45 cw(c0,45) 0,45.254 80,45.254 cw(c80,45) 80.254,45 80.254,0 cw(c80,0) 80,-0.254
GND on Top Layer "GND_L01_P005" (solid, remove dead copper, pour order 5): 0,-0.254 cw(c0,0) -0.254,0 -0.254,45 cw(c0,45) 0,45.254 80,45.254 cw(c80,45) 80.254,45 80.254,0 cw(c80,0) 80,-0.254

## Keep-outs
Keep-Out Layer:
  lines w0.508: 0,0 0,45 80,45 80,0 0,0

## Silkscreen, mask and mechanical layers (free items; w line width, h text height)
Top Overlay:
  drawing of 11 lines, arcs and shapes, not listed

## Text inside footprints (layer, text, board x,y; h text height)
B*1: Top Overlay "+" at 46.787,1.499 h2.86 r90
LOGO1: Top Overlay "PIF" at 71.026,1.626 h1.43
P6: Top Overlay "5" at 12.664,40.185 h1.02 r180; Top Overlay "1" at 22.564,40.185 h1.02 r180
P7: Top Overlay "1" at 77.174,40.185 h1.02 r180; Top Overlay "16" at 39.584,40.185 h1.02 r180